# EAGLE board #6 v2 (EAGLE 9.7.0)
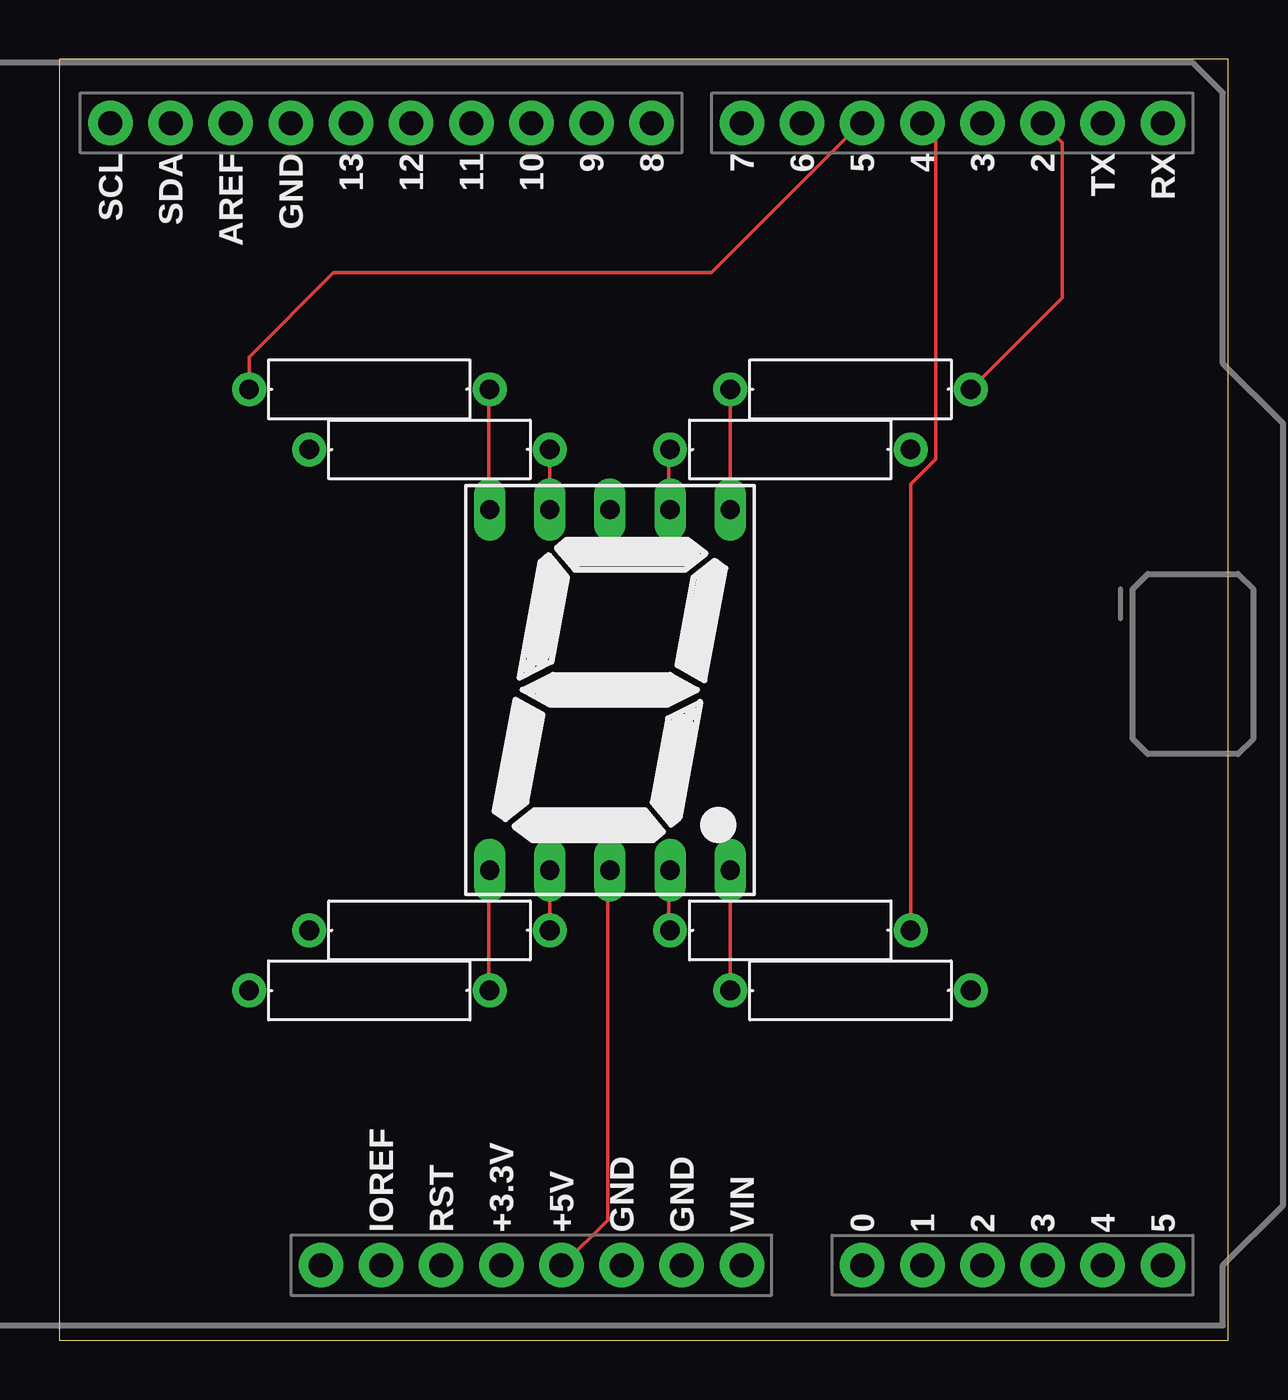
[diagram p0: board, top side]
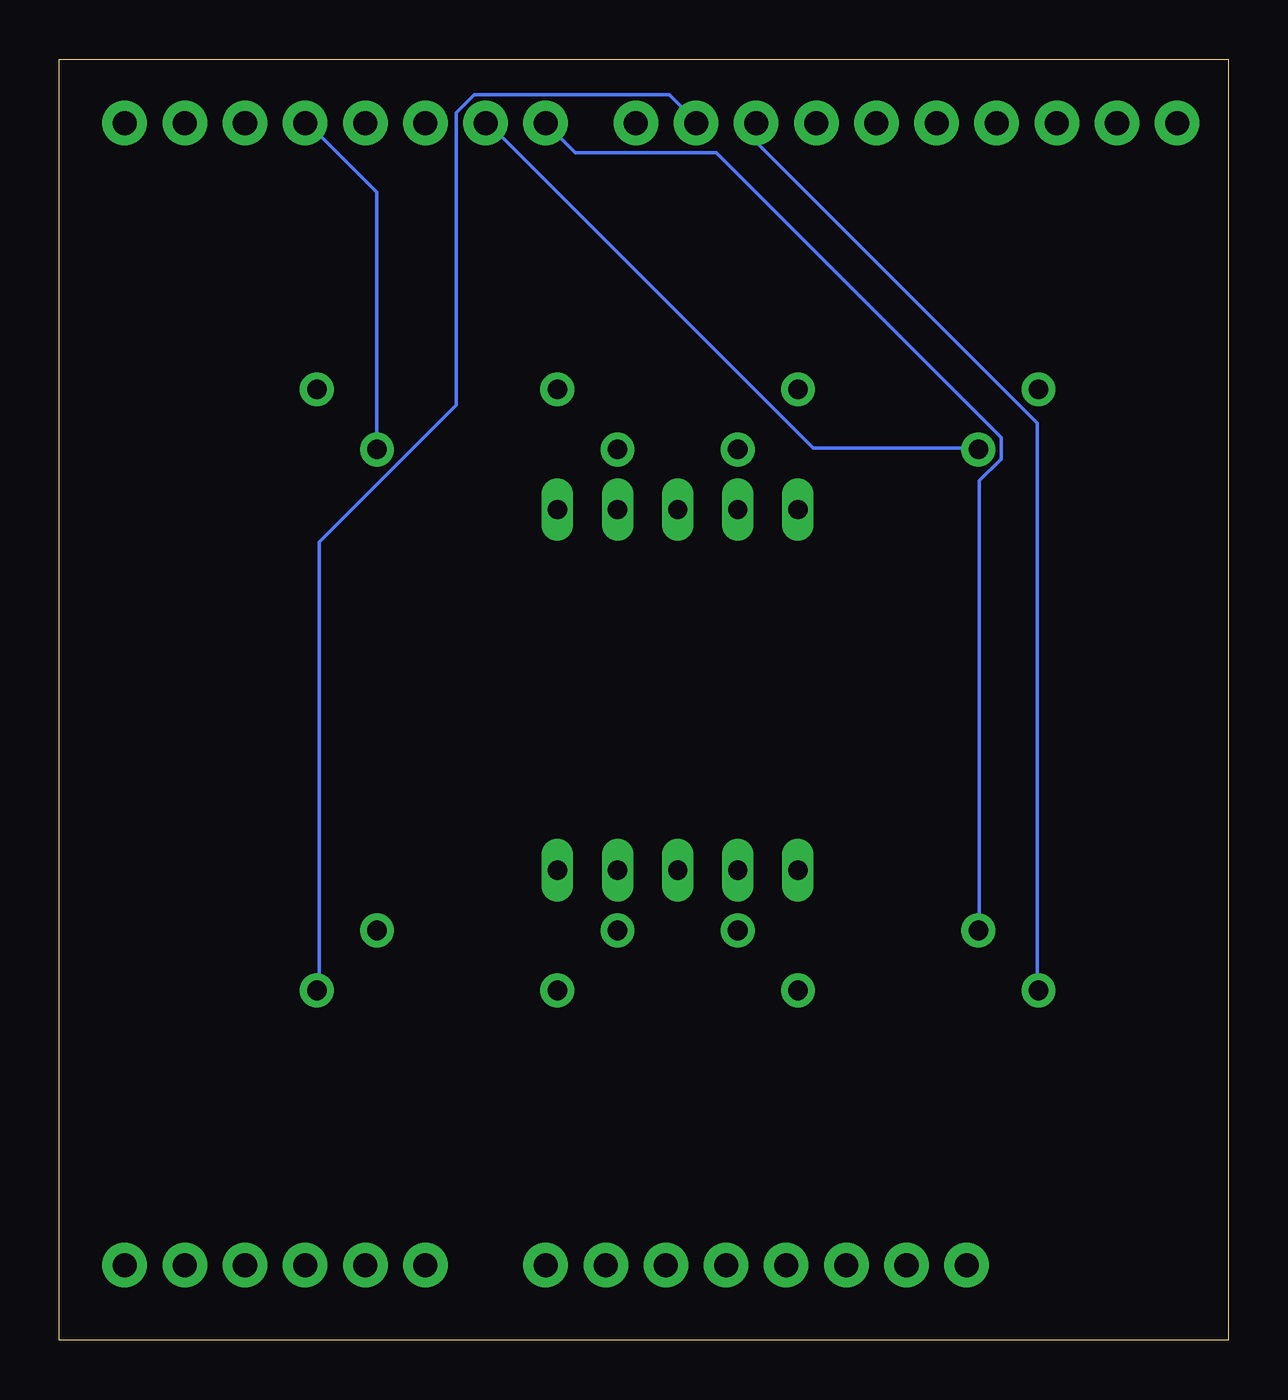
[diagram p1: board, bottom side, seen from below]

Size 49.38 x 54.13 mm. Coordinates in mm from the lower left corner, seen from the top.
Outline: 0,0 49.38,0 49.38,54.13 0,54.13 0,0
Copper layers (1*16): Top 0.035mm / dielectric 1.5mm / Bottom 0.035mm
Design rules "default": minimum track width 6mil, minimum drill 0.35mm, track to track 6mil, track to pad 6mil, pad to pad 6mil, via to via 6mil, smd to smd 6mil, copper to edge 40mil, drill to drill 6mil, minimum pad ring 10mil, minimum via ring 8mil, stop-mask expansion 4mil, vias tented up to drill 0mil, thermal gap 10mil

## Footprints (pad centres in the part's own frame; a part is rotated, then mirrored left to right if it is on the bottom)
7SEG-13 = drill 0.813 long: 1 -5.08,-7.62; 2 -2.54,-7.62; 3 0,-7.62; 4 2.54,-7.62; 5 5.08,-7.62; 6 5.08,7.62; 7 2.54,7.62; 8 0,7.62; 9 -2.54,7.62; 10 -5.08,7.62
RESAD1016W63L850D250B = drill 0.83 pad 1.43: 1 -5.08,0; 2 5.08,0
ARDUINO-UNO-R3-SHIELD = drill 1.016 pad 1.88: 3.3V 24.13,-2.54; 5V 24.13,0; A0 24.13,12.7; A1 24.13,15.24; A2 24.13,17.78; A3 24.13,20.32; A4 24.13,22.86; A5 24.13,25.4; AREF -24.13,-13.97; D2 -24.13,20.32; D3 -24.13,17.78; D4 -24.13,15.24; D5 -24.13,12.7; D6 -24.13,10.16; D7 -24.13,7.62; D8 -24.13,3.81; D9 -24.13,1.27; D10 -24.13,-1.27; D11 -24.13,-3.81; D12 -24.13,-6.35; D13 -24.13,-8.89; GND@0 24.13,2.54; GND@1 24.13,5.08; GND@2 -24.13,-11.43; IOREF 24.13,-7.62; NC 24.13,-10.16; RES 24.13,-5.08; RX -24.13,25.4; SCL -24.13,-19.05; SDA -24.13,-16.51; TX -24.13,22.86; VIN 24.13,7.62

## Placement (x,y rotation side)
DIGIT1  7SEG-CA  [7SEG-13]  23.26,27.48 0 top
R1  1k  [RESAD1016W63L850D250B]  30.88,37.64 0 top
R2  1k  [RESAD1016W63L850D250B]  33.42,40.18 0 top
R3  1k  [RESAD1016W63L850D250B]  33.42,14.78 0 top
R4  1k  [RESAD1016W63L850D250B]  30.88,17.32 0 top
R5  1k  [RESAD1016W63L850D250B]  13.1,14.78 0 top
R6  1k  [RESAD1016W63L850D250B]  15.64,17.32 0 top
R7  1k  [RESAD1016W63L850D250B]  13.1,40.18 0 top
R8  1k  [RESAD1016W63L850D250B]  15.64,37.64 0 top
U1  ARDUINO-UNO-R3-SHIELD  [ARDUINO-UNO-R3-SHIELD]  21.21,27.3 270 top

## Library data of the parts
DIGIT1 = Tinkercad; CATEGORY: Opto-Electronic; SUB-CATEGORY: Display; TYPE: 7-Segment
R1-R8 U1 = Tinkercad

## Nets
DIGIT1_A: DIGIT1.7 R1.1
DIGIT1_B: DIGIT1.6 R2.1
DIGIT1_C: DIGIT1.4 R4.1
DIGIT1_D: DIGIT1.2 R6.2
DIGIT1_DP: DIGIT1.5 R3.1
DIGIT1_E: DIGIT1.1 R5.2
DIGIT1_F: DIGIT1.9 R8.2
DIGIT1_G: DIGIT1.10 R7.2
U1_5V: DIGIT1.3 U1.5V
U1_D2: R2.2 U1.D2
U1_D3: R1.2 U1.D3
U1_D4: R4.2 U1.D4
U1_D5: R7.1 U1.D5
U1_D6: R8.1 U1.D6
U1_D7: R6.1 U1.D7
U1_D9: R3.2 U1.D9
U1_D10: R5.1 U1.D10

## Tracks (layer width: path | path; a pad name or v marks a point on that pad's centre or on a via)
DIGIT1_A
  Top 0.152: DIGIT1.7 25.76,35.1 25.76,37.54 R1.1
DIGIT1_B
  Top 0.152: DIGIT1.6 28.35,40.13 R2.1
DIGIT1_C
  Top 0.152: DIGIT1.4 25.76,19.71 25.76,17.42 R4.1
DIGIT1_D
  Top 0.152: DIGIT1.2 20.73,19.71 20.73,17.42 R6.2
DIGIT1_DP
  Top 0.152: DIGIT1.5 28.35,19.71 28.35,14.83 R3.1
DIGIT1_E
  Top 0.152: DIGIT1.1 18.14,19.71 18.14,14.83 R5.2
DIGIT1_F
  Top 0.152: DIGIT1.9 20.73,37.54 R8.2
DIGIT1_G
  Top 0.152: DIGIT1.10 18.14,35.1 18.14,40.13 R7.2
U1_5V
  Top 0.152: DIGIT1.3 23.16,19.71 23.16,5.08 21.34,3.25 U1.5V
U1_D2
  Top 0.152: U1.D2 42.37,50.6 42.37,44.05 R2.2
U1_D3
  Bottom 0.152: R1.2 35.97,37.69 35.97,48.51 38.86,51.41 U1.D3
U1_D4
  Top 0.152: R4.2 35.97,17.42 35.97,36.17 37.03,37.24 37.03,50.95 36.58,51.41 U1.D4
U1_D5
  Top 0.152: R7.1 8.02,41.55 11.58,45.11 27.53,45.11 33.83,51.41 U1.D5
U1_D6
  Bottom 0.152: R8.1 10.67,37.69 17.53,37.69 31.24,51.41 U1.D6
U1_D7
  Bottom 0.152: R6.1 10.52,17.42 10.52,36.32 9.6,37.24 9.6,38.15 21.64,50.19 27.58,50.19 28.8,51.41 U1.D7
U1_D9
  Bottom 0.152: R3.2 38.41,14.83 38.41,33.73 32.61,39.52 32.61,51.87 31.85,52.63 23.62,52.63 22.55,51.56 U1.D9
U1_D10
  Bottom 0.152: R5.1 8.08,14.83 8.08,38.76 19.81,50.49 19.81,51.41 U1.D10